# Altium PCB sense_template.PcbDoc
Units mm, origin at the board's own origin, x right, y up, seen from the top; angles counter-clockwise.
Board outline 23.2 x 22.2 mm, 2 copper layers (Top Layer, Bottom Layer); 5 components, 15 nets, 23 pads, 0 vias.
Unrouted connection lines stored in the file: 25.
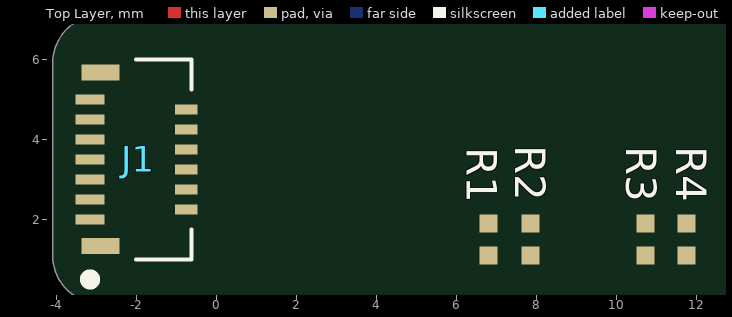
[diagram p0: Top Layer view]
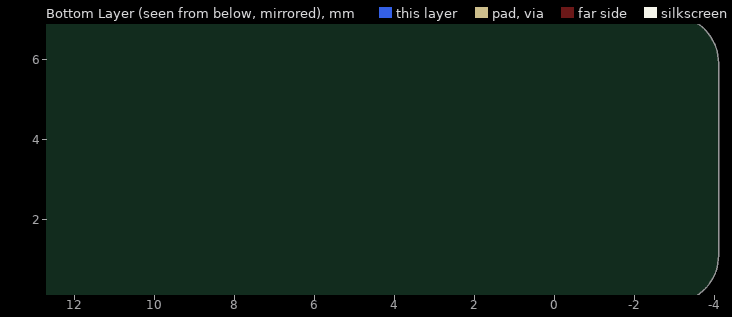
[diagram p1: Bottom Layer view, seen from below]

## Layer stack, top to bottom
Top Solder: solder mask 0.0102, Solder Resist, Dk 3.5
Top Layer: signal copper 0.0356
Dielectric 1: dielectric 0.32, FR-4, Dk 4.8
Bottom Layer: signal copper 0.0356
Bottom Solder: solder mask 0.0102, Solder Resist, Dk 3.5

## Board outline
-2.9,-0.1 17,-0.1 17.001,-0.1 ccw(c17,2) 19.1,1.999 19.1,2 19.1,20 19.1,20.002 ccw(c17,20) 17.001,22.1 17,22.1 2,22.1 1.998,22.1 ccw(c2,20) -0.1,20 -0.1,7.9 cw(c-0.884,7.9) -0.884,7.116 -2.884,7.116 ccw(c-2.884,5.9) -4.1,5.9 -4.1,1.1 ccw(c-2.9,1.1)

## Design rules (kind name [scope] priority, off if disabled: settings)
Clearance [All] p1: gap=0.127 ignorepadtopadclearanceinfootprint=FALSE
PolygonConnect [All] p1: thpad.connectstyle=Relief thpad.reliefconductorwidth=0.254 thpad.reliefentries=4 thpad.polygonreliefangle="90 Angle" thpad.airgapwidth=0.254 smdpad.connectstyle=Relief smdpad.reliefconductorwidth=0.254 smdpad.reliefentries=4 smdpad.polygonreliefangle="90 Angle" smdpad.airgapwidth=0.254 via.connectstyle=Direct via.reliefconductorwidth=0.254 via.reliefentries=4 via.polygonreliefangle="90 Angle" via.airgapwidth=0.254
RoutingVias [All] p1: holewidth=0.254 width=1.27 viastyle="Through Hole" minholewidth=0.254 minwidth=0.508 maxholewidth=0.711 maxwidth=1.27
SolderMaskExpansion [IsVia] p1: expansion=0.102 istentingtop=TRUE
Width [All] p1: maxlimit=0.635 minlimit=0.102 preferedwidth=0.178
30 further rules are at their usual default settings.

## Components (designator, comment, footprint, x,y, rotation, side; value= is the part's Value field where it differs from the comment)
J1 "502078-1362" 5020781362 -2,3.5 r270 top
R1 "4.7K" RESC1005X40X25LL05T05 6.8,1.5 r270 top
R2 "4.7K" RESC1005X40X25LL05T05 7.85,1.5 r270 top
R3 "4.7K" RESC1005X40X25LL05T05 10.725,1.5 r270 top
R4 "4.7K" RESC1005X40X25LL05T05 11.75,1.5 r270 top

## Footprints (in the part's own frame and the unit in brackets; to place one, negate y for a bottom-side part, rotate by r counter-clockwise, add the part's x,y. Pads: shape width x height; smd on the part's side, far side on the other; paste and mask are expansions set on the pad)
5020781362 [mm]
  rect 0.25x0.72 smd: 1(1.5,-1.165) 3(1,-1.165) 5(0.5,-1.165) 7(0,-1.165) 9(-0.5,-1.165) 11(-1,-1.165) 13(-1.5,-1.165)
  rect 0.25x0.57 smd: 2(1.25,1.24) 4(0.75,1.24) 6(0.25,1.24) 8(-0.25,1.24) 10(-0.75,1.24) 12(-1.25,1.24)
  rect 0.4x0.95 smd: MP1(2.17,-0.9) MP2(-2.17,-0.9)
  silkscreen extent -2.5,-1.21 3.05,1.38, body extent -2.5,-1.63 2.5,1.36, height 1
RESC1005X40X25LL05T05 [mm] "Chip Resistor, 2-Leads, Body 1.05x0.55mm, IPC High Density"
  rect 0.45x0.45 smd: 1(-0.4,0) 2(0.4,0)
  body extent -0.53,-0.28 0.53,0.28, height 0.4

## Part data
J1: "Connector", Manufacturer_Name=Molex, Mouser Part Number=538-502078-1362, Datasheet Link=https://www.molex.com/pdm_docs/sd/5020781362_sd.pdf, Height=1.7mm, Manufacturer_Part_Number=502078-1362, Mouser Price/Stock=https://www.mouser.co.uk/ProductDetail/Molex/502078-1362?qs=GBLSl2Akirt8csfPYHMErA%3D%3D
R1 R2 R3 R4: library part CMP-2002-01154-4, "Chip Resistor, 4.7 KOhm, +/- 1%, 0.1 W, -55 to 155 degC, 0402 (1005 Metric), RoHS, Tape and Reel", Case Code (Imperial)=0402, Case Code (Metric)=1005, Max Operating Temperature="155 degC", Min Operating Temperature="-55 degC", Package Quantity=1, PartNumber=ERJ-2RKF4701X, Power Rating="100 mW", Resistance="4.7 KOhm", Tolerance=1%, Voltage Rating="50 V", Case\/Package=0402, ComponentLink1Description="Manufacturer URL", ComponentLink1URL=http://www.panasonic.com/, ComponentLink2Description=Datasheet, ComponentLink2URL=http://industrial.panasonic.com/cdbs/www-data/pdf/RDA0000/AOA0000C86.pdf, DatasheetVersion=04/2015, Height="0.35 mm", Length="1 mm", Mount="Surface Mount", Mounting Technology="Surface Mount", PackageDescription="2-Pin Surface Mount Device, Body 1 x 0.5 mm", PackageReference=0402, Packaging="Cut Tape", Pins=2, Radiation Hardening=No, REACH SVHC=Yes, RoHSCompliant=true, Width="0.5 mm"

## Nets (pads, with @x,y where several pads share a name; then routed paths per layer and width w, separated by ;. In a path a pad name is that pad's centre, name@x,y a point inside that pad or via, vN(x,y) a via of type N, cw(c..) or ccw(c..) an arc to the next point about the centre after c; other vN are vias at no path point)
1V8: J1.3
3V3: J1.1 R1.2 R2.2 R3.2 R4.2
A_INT: J1.13
B_INT: J1.11
C_INT: J1.9
D_INT: J1.7
GND: J1.5 J1.6 J1.8 J1.MP1 J1.MP2
I2C_CH1_SCK: J1.10 R3.1
I2C_CH1_SDA: J1.12 R4.1
I2C_CH2_SCK: J1.2 R1.1
I2C_CH2_SDA: J1.4 R2.1
NetC3_1: 
NetC6_1: 
NetC9_1: 
NetC12_1: 

## Other copper
Top Layer:
  pour cut-out: -0.75,5.75 -3.25,5.75 -3.25,1.25 -0.75,1.25

## Silkscreen, mask and mechanical layers (free items; w line width, h text height)
Mechanical 1:
  lines w0.203: -4.1,1.1 ccw(c-2.9,1.1) -2.9,-0.1 17,-0.1 17.001,-0.1 ccw(c17,2) 19.1,1.999 19.1,2 19.1,20 19.1,20.002 ccw(c17,20) 17.001,22.1 17,22.1 2,22.1 1.998,22.1 ccw(c2,20) -0.1,20 -0.1,7.9 cw(c-0.884,7.9) -0.884,7.116 -2.884,7.116 ccw(c-2.884,5.9) -4.1,5.9 -4.1,1.1